# Altium PCB MainFCC_PCBBoard.PcbDoc (part 1 of 3)
Units mm, origin at the board's own origin, x right, y up, seen from the top; angles counter-clockwise.
Board outline 100 x 50 mm, 6 copper layers (Top Signal, GND1, Power, Signal, GND 2, Bottom Signal), stack 1.642 mm thick; 119 components, 79 nets, 546 pads, 1133 vias.
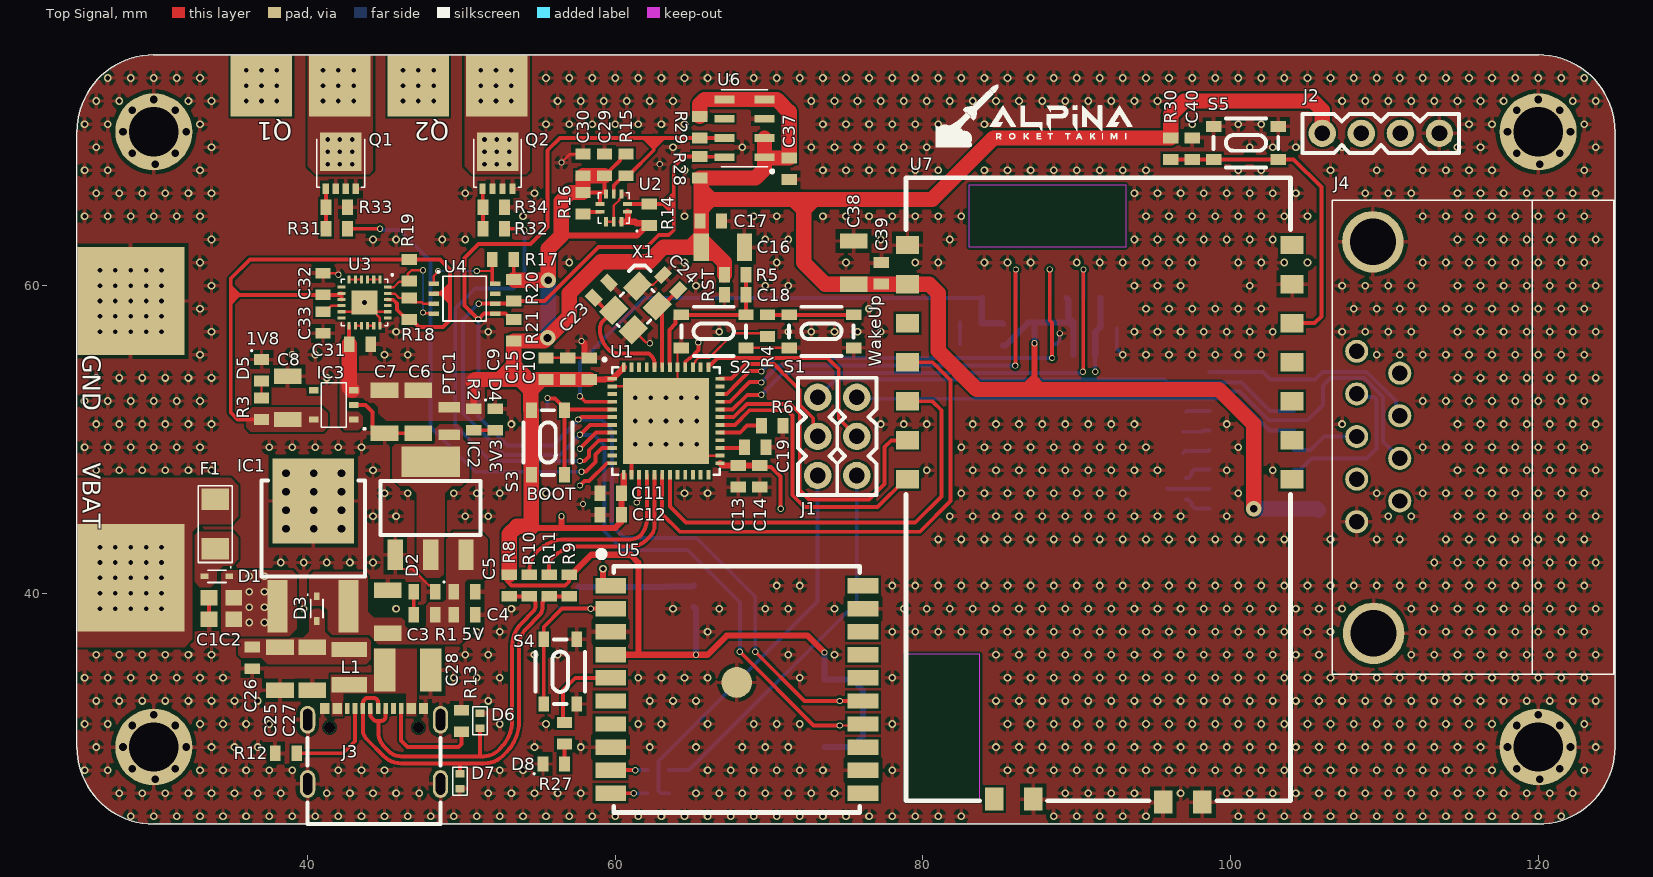
[diagram p0: Top Signal view]
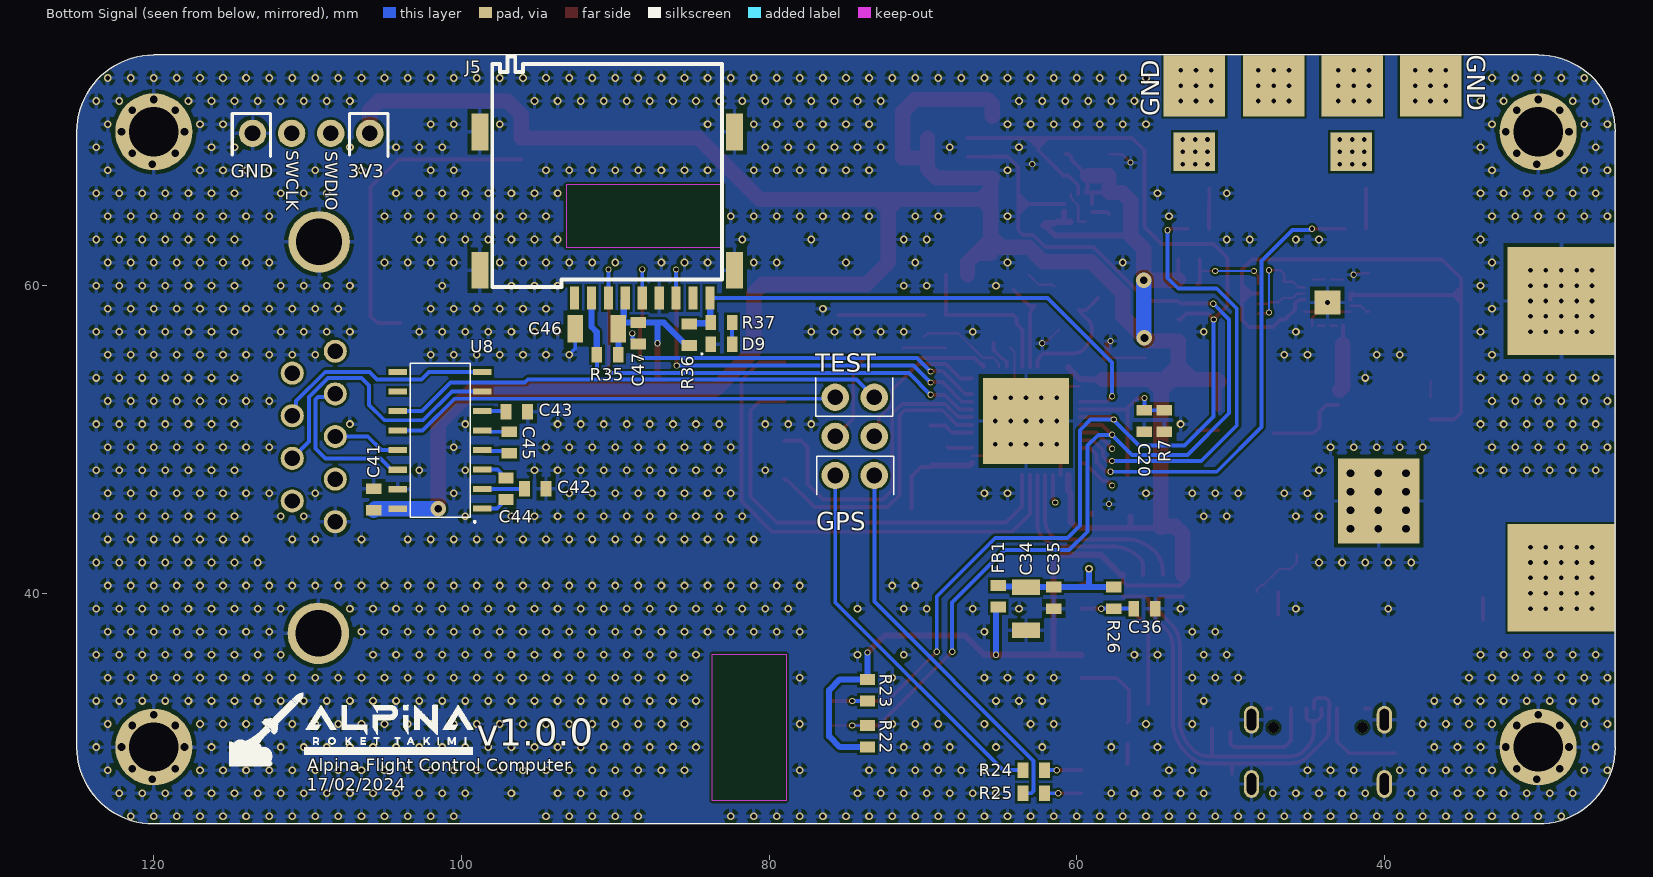
[diagram p1: Bottom Signal view, seen from below]
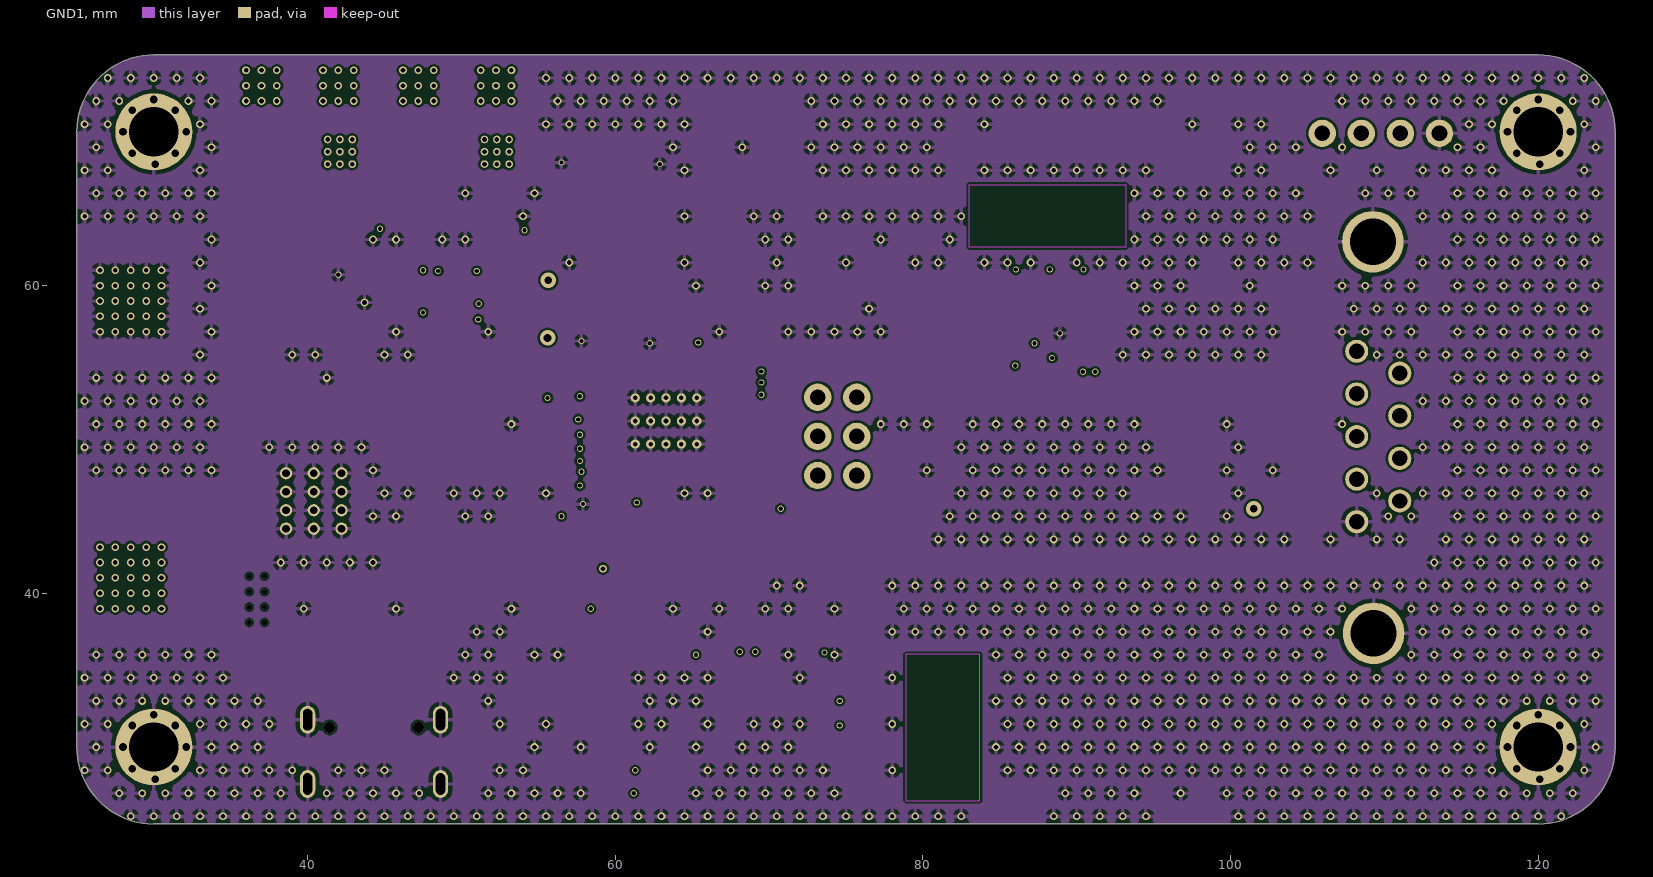
[diagram p2: GND1]
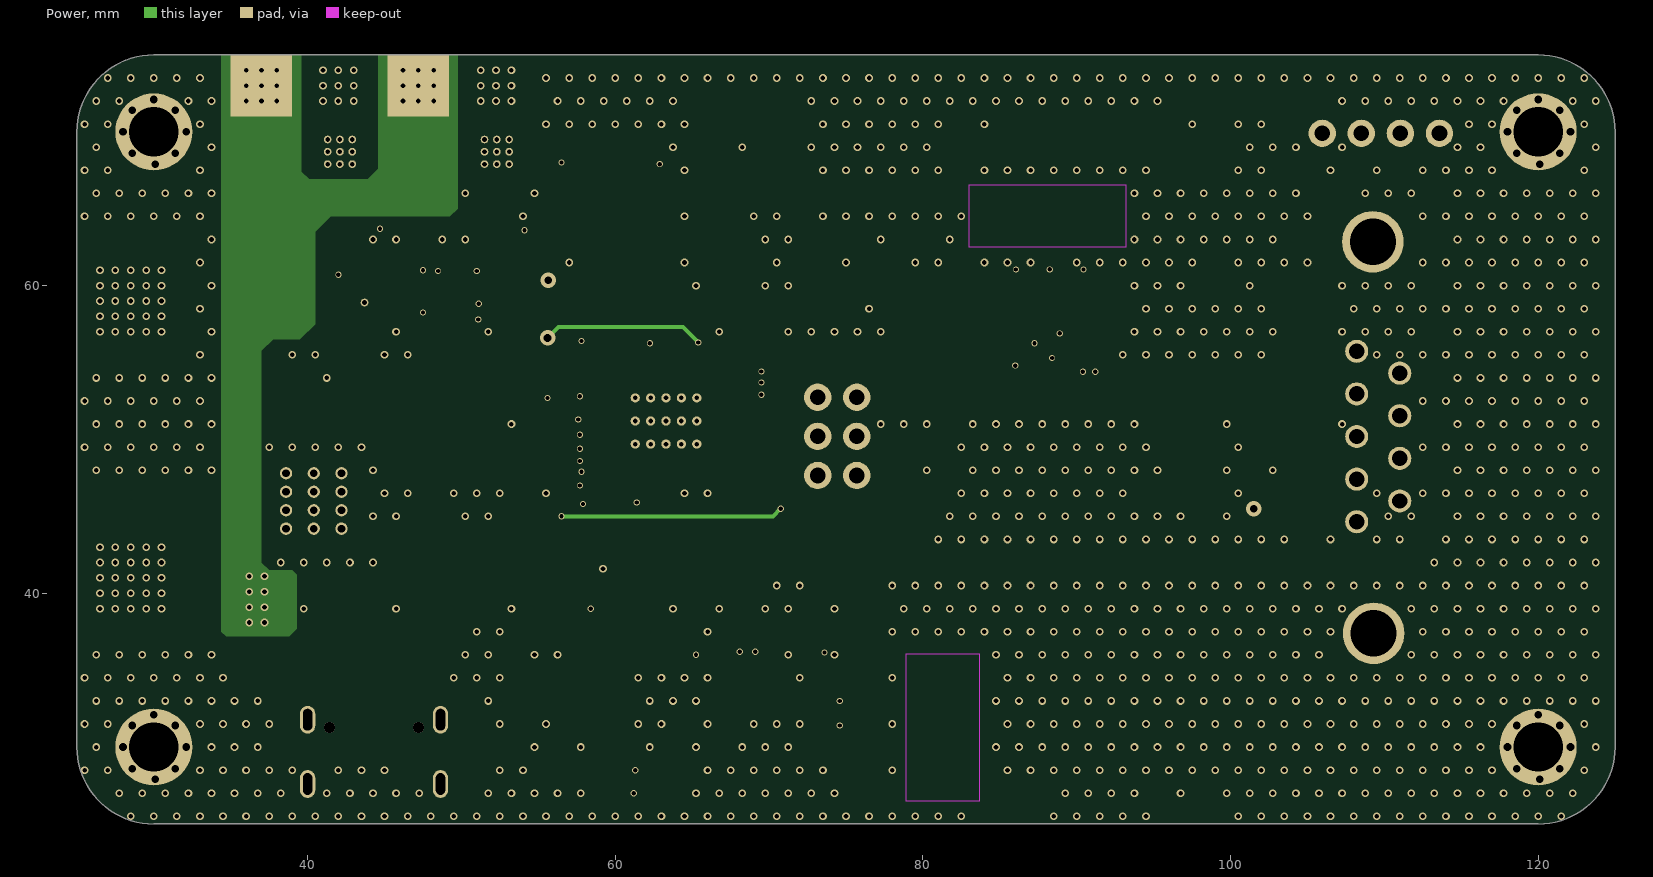
[diagram p3: Power]
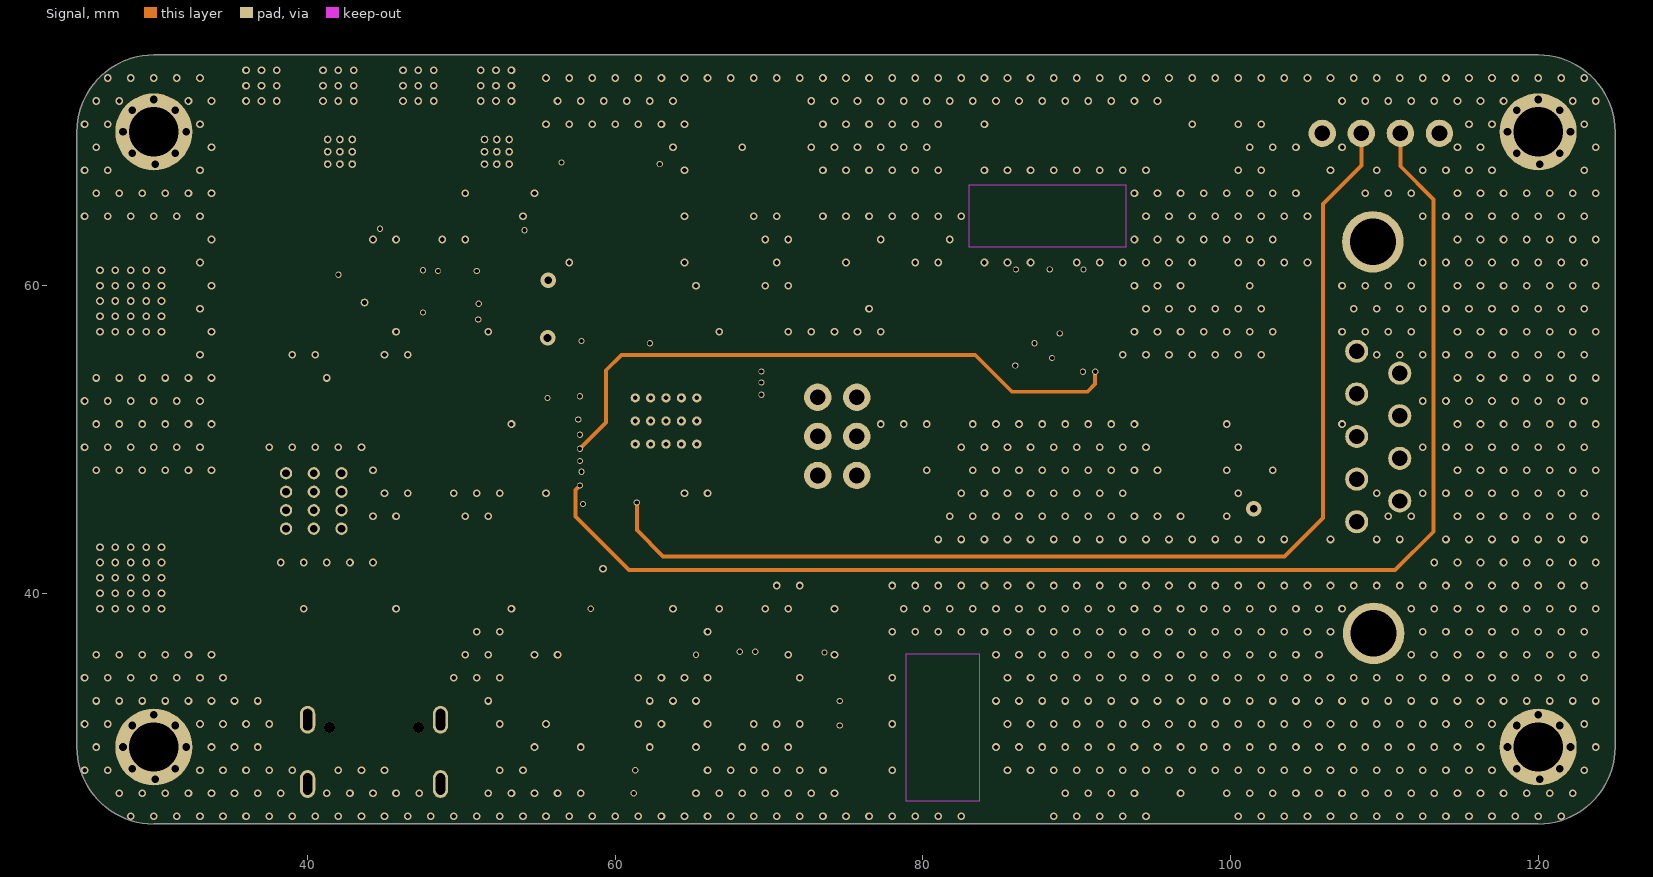
[diagram p4: Signal]
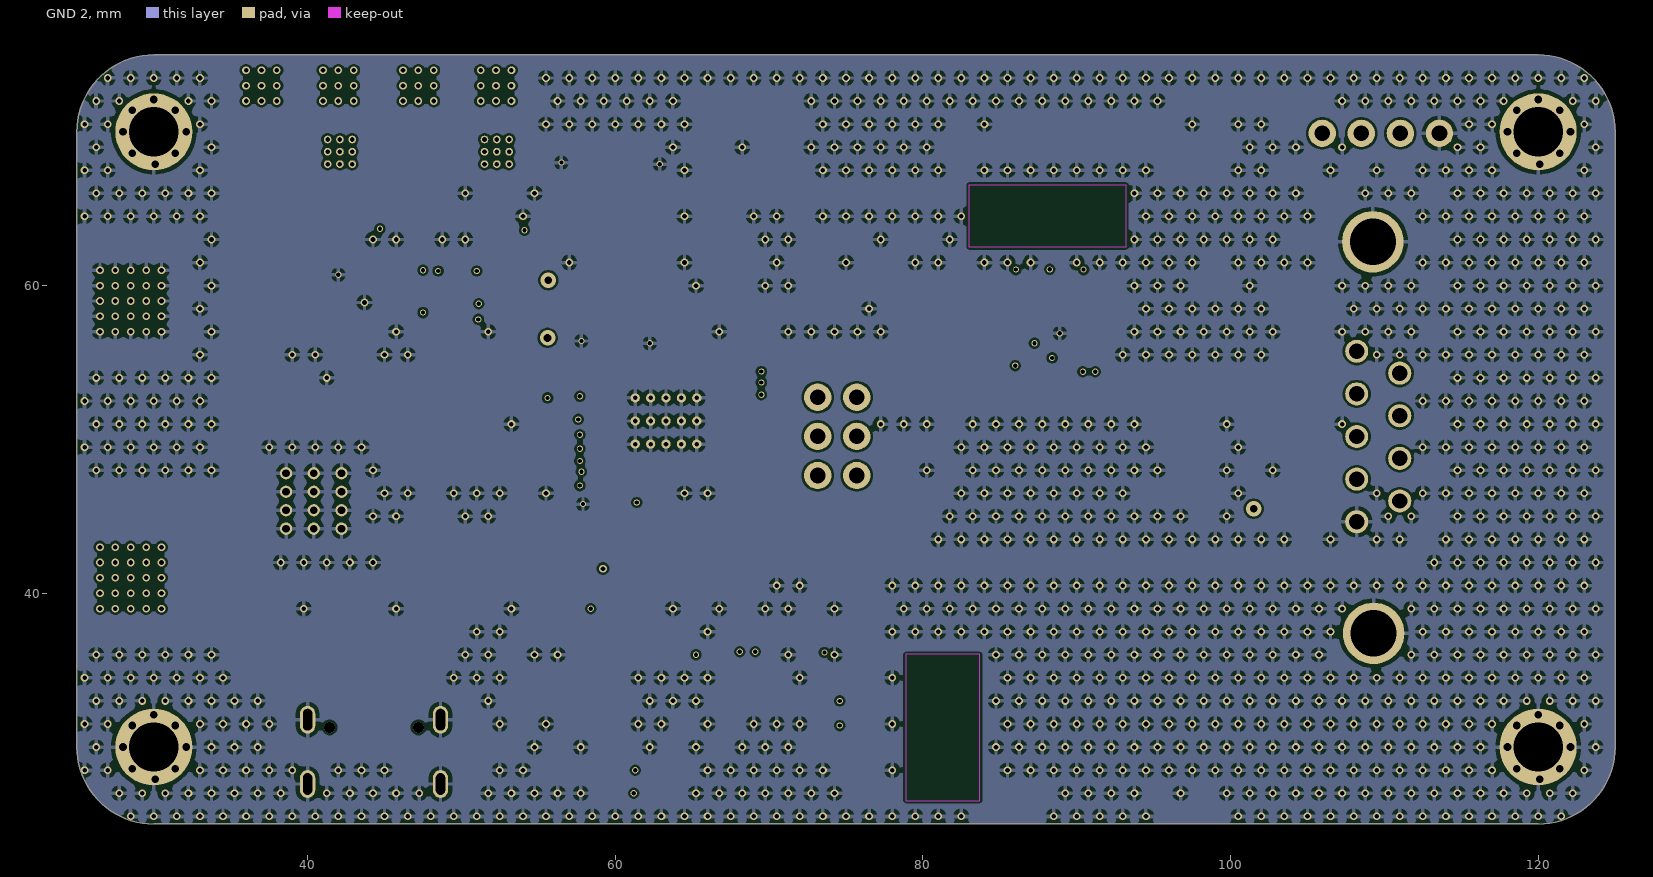
[diagram p5: GND 2]

## Layer stack, top to bottom
Top Solder: solder mask 0.0102, Solder Resist, Dk 3.5
Top Signal: signal copper 0.018
Dielectric 2: prepreg 0.1295, PP-017, Dk 4.3
GND1: signal copper 0.035
Dielectric 3: core 0.508, Core-036, Dk 4.6
Power: signal copper 0.035
Dielectric 1: core 0.1905, Core-023, Dk 4.2
Signal: signal copper 0.035
Dielectric 4: core 0.508, Core-036, Dk 4.6
GND 2: signal copper 0.035
Dielectric 5: prepreg 0.1295, PP-017, Dk 4.3
Bottom Signal: signal copper 0.018
Bottom Solder: solder mask 0.0102, Solder Resist, Dk 3.5

## Board outline
120,25 ccw(c120,30) 125,30 125,70 ccw(c120,70) 120,75 30,75 ccw(c30,70) 25,70 25,30 ccw(c30,30) 30,25

## Design rules (kind name [scope] priority, off if disabled: settings)
Clearance [All] p1: gap=0.152 ignorepadtopadclearanceinfootprint=TRUE except(0.102: Arc-Text Track-Text SMDPad-Text THPad-Text Via-Text Fill-Text Poly-Text Region-Text Text-Text Text-Hole)
DiffPairsRouting [All] p1: maxlimit=0.254 minlimit=0.152 mostfreqgap=0.254 toplayer_prefgap=0.203 toplayer_minwidth=0.152 toplayer_maxwidth=3.048 toplayer_prefwidth=0.254 midlayer1_mingap=0.254 midlayer1_minwidth=0.381 midlayer1_maxwidth=0.381 midlayer1_prefwidth=0.381 midlayer2_mingap=0.254 midlayer2_minwidth=0.381 midlayer2_maxwidth=0.381 midlayer2_prefwidth=0.381 midlayer3_mingap=0.254 midlayer3_minwidth=0.381 midlayer3_maxwidth=0.381 midlayer3_prefwidth=0.381 midlayer4_mingap=0.254 midlayer4_minwidth=0.381 midlayer4_maxwidth=0.381 midlayer4_prefwidth=0.381 bottomlayer_prefgap=0.203 bottomlayer_minwidth=0.152 bottomlayer_maxwidth=3.048 bottomlayer_prefwidth=0.254 maxuncoupledlength=12.7
HoleSize [All] p1: absolutevalues=TRUE maxlimit=6.35 minlimit=0.279 maxpercent=80.000 minpercent=20.000
HoleToHoleClearance [All] p1: gap=0.152 allowstackedmicrovias=TRUE
MinimumSolderMaskSliver MinimumSolderMaskSliver_24-QFN [HasFootprint('MergenElektronik_Sensors_Gyroscope-Accelerometer-Magnetometer_24-QFN') vs HasFootprint('MergenElektronik_Sensors_Gyroscope-Accelerometer-Magnetometer_24-QFN')] p1: minsoldermaskwidth=0
MinimumSolderMaskSliver MinimumSolderMaskSliver_UFQFPN-48 [HasFootprint('MergenElektronik_Microcontrollers_STMicroelectronics_UFQFPN-48') vs HasFootprint('MergenElektronik_Microcontrollers_STMicroelectronics_UFQFPN-48')] p2: minsoldermaskwidth=0
MinimumSolderMaskSliver MinimumSolderMaskSliver_UFQFPN20 [HasFootprint('MergenElektronik_Microcontrollers_STMicroelectronics_UFQFPN-20') vs HasFootprint('MergenElektronik_Microcontrollers_STMicroelectronics_UFQFPN-20')] p3: minsoldermaskwidth=0
MinimumSolderMaskSliver [All] p4: minsoldermaskwidth=0.076
PasteMaskExpansion [All] p1: expansion=-2539.975 usepaste=FALSE
PlaneClearance [All] p1: clearance=0.305
PlaneConnect [All] p1: planeconnectstyle=Relief reliefexpansion=0.254 reliefentries=4 reliefconductorwidth=0.254 reliefairgap=0.254
PolygonConnect PolygonConnect_12 [All vs IsNamedPolygon('GND_L01_P018') Or IsNamedPolygon('GND_L02_P009') Or IsNamedPolygon('GND_L05_P010') Or IsNamedPolygon('GND_L06_P012')] p1: connectstyle=Relief reliefconductorwidth=0.254 reliefentries=4 polygonreliefangle="90 Angle" airgapwidth=0.254
PolygonConnect PolygonConnect_11 [All vs IsNamedPolygon('1V8_L01_P016') Or IsNamedPolygon('3V3_L01_P015') Or IsNamedPolygon('5V_L01_P007') Or IsNamedPolygon('GND_L01_P018') Or IsNamedPolygon('NETC28_1_L01_P000') Or IsNamedPolygon('NETD1_1_L01_P004') Or IsNamedPolygon('NETPTC1_1_L01_P011') Or IsNamedPolygon('NETQ1_5_L01_P002') Or IsNamedPolygon('NETQ2_5_L01_P001') Or IsNamedPolygon('VBAT_L01_P005') Or IsNamedPolygon('VBUS_L01_P006') Or IsNamedPolygon('VCC_L01_P003') Or IsNamedPolygon('GND_L02_P009') Or IsNamedPolygon('VBAT_L03_P013') Or IsNamedPolygon('GND_L05_P010') Or IsNamedPolygon('GND_L06_P012') Or IsNamedPolygon('NETQ1_5_L06_P014') Or IsNamedPolygon('NETQ2_5_L06_P017')] p2: connectstyle=Direct reliefconductorwidth=0.254 reliefentries=4 polygonreliefangle="90 Angle" airgapwidth=0.254
PolygonConnect PolygonConnect_10 [All vs IsNamedPolygon('NETC28_1_L01_P000')] p3: connectstyle=Direct reliefconductorwidth=0.254 reliefentries=4 polygonreliefangle="90 Angle" airgapwidth=0.254
PolygonConnect PolygonConnect_9 [All vs IsNamedPolygon('NETQ1_5_L01_P002') Or IsNamedPolygon('NETQ2_5_L01_P001') Or IsNamedPolygon('NETQ1_5_L06_P014') Or IsNamedPolygon('NETQ2_5_L06_P017')] p4: connectstyle=Direct reliefconductorwidth=0.254 reliefentries=4 polygonreliefangle="90 Angle" airgapwidth=0.254
PolygonConnect PolygonConnect_8 [All vs IsNamedPolygon('VBAT_L03_P013')] p5: connectstyle=Direct reliefconductorwidth=0.254 reliefentries=4 polygonreliefangle="90 Angle" airgapwidth=0.254
PolygonConnect PolygonConnect_7 [All vs IsNamedPolygon('1V8_L01_P016') Or IsNamedPolygon('3V3_L01_P015') Or IsNamedPolygon('5V_L01_P007') Or IsNamedPolygon('NETD1_1_L01_P004') Or IsNamedPolygon('NETPTC1_1_L01_P011') Or IsNamedPolygon('VBAT_L01_P005') Or IsNamedPolygon('VBUS_L01_P006') Or IsNamedPolygon('VCC_L01_P003')] p6: connectstyle=Direct reliefconductorwidth=0.254 reliefentries=4 polygonreliefangle="90 Angle" airgapwidth=0.254
PolygonConnect PolygonConnect_6 [All vs IsNamedPolygon('VCC_L01_P003')] p7: connectstyle=Relief reliefconductorwidth=0.254 reliefentries=4 polygonreliefangle="90 Angle" airgapwidth=0.254
PolygonConnect PolygonConnect_5 [All vs IsNamedPolygon('1V8_L01_P016')] p8: connectstyle=Direct reliefconductorwidth=0.254 reliefentries=4 polygonreliefangle="90 Angle" airgapwidth=0.254
PolygonConnect PolygonConnect_4 [All vs IsNamedPolygon('3V3_L01_P015') Or IsNamedPolygon('5V_L01_P007') Or IsNamedPolygon('NETD1_1_L01_P004') Or IsNamedPolygon('NETPTC1_1_L01_P011') Or IsNamedPolygon('VBAT_L01_P005') Or IsNamedPolygon('VBUS_L01_P006') Or IsNamedPolygon('VCC_L01_P003')] p9: connectstyle=Direct reliefconductorwidth=0.254 reliefentries=4 polygonreliefangle="90 Angle" airgapwidth=0.254
PolygonConnect PolygonConnect_3 [All vs IsNamedPolygon('VBAT_L01_P005')] p10: connectstyle=Direct reliefconductorwidth=0.254 reliefentries=4 polygonreliefangle="90 Angle" airgapwidth=0.254
PolygonConnect PolygonConnect_2 [All vs IsNamedPolygon('NETD1_1_L01_P004')] p11: connectstyle=Direct reliefconductorwidth=0.254 reliefentries=4 polygonreliefangle="90 Angle" airgapwidth=0.254
PolygonConnect PolygonConnect_1 [All vs IsNamedPolygon('VCC_L01_P003')] p12: connectstyle=Direct reliefconductorwidth=0.254 reliefentries=4 polygonreliefangle="90 Angle" airgapwidth=0.254
PolygonConnect [All] p13: connectstyle=Relief reliefconductorwidth=0.254 reliefentries=4 polygonreliefangle="90 Angle" airgapwidth=0.254
RoutingCorners [All] p1: cornerstyle=45-Degree minsetback=1.016 maxsetback=1.016
RoutingTopology [All] p1: topology=Daisy_Balanced
RoutingVias [All] p1: holewidth=0.305 width=0.406 viastyle="Through Hole" minholewidth=0.279 minwidth=0.406 maxholewidth=6.35 maxwidth=8.128
SilkToSilkClearance [All] p1: silktosilkclearance=0.076
SilkToSolderMaskClearance [IsPad] p1: minsilkscreentomaskgap=0.076 clearancetoexposedcopper=TRUE
SolderMaskExpansion [All] p1: expansion=0.102 istentingtop=FALSE
SupplyNets "Schematic Supply Nets_11" [InNet('3V3')] p1: voltage=0.000
SupplyNets "Schematic Supply Nets_10" [InNet('1V8')] p2: voltage=0.000
SupplyNets "Schematic Supply Nets_9" [InNet('5V')] p3: voltage=0.000
SupplyNets "Schematic Supply Nets_8" [InNet('GND')] p4: voltage=0.000
SupplyNets "Schematic Supply Nets_7" [InNet('VBUS')] p5: voltage=0.000
SupplyNets "Schematic Supply Nets" [InNet('VBAT')] p6: voltage=0.000
SupplyNets "Schematic Supply Nets_1" [InNet('VCC')] p7: voltage=0.000
Width [All] p1: maxlimit=5.08 minlimit=0.152 preferedwidth=0.254 midlayer1_minwidth=0.254 midlayer1_maxwidth=0.254 midlayer2_minwidth=0.254 midlayer2_maxwidth=0.254 midlayer3_minwidth=0.254 midlayer3_maxwidth=0.254 midlayer4_minwidth=0.254 midlayer4_maxwidth=0.254 minimp=50.000000 maximp=50.000000 favimp=50.000000
19 further rules are at their usual default settings.

## Classes and differential pairs
differential pair class USB_Lines: USB V_USB
net class USB: USB_N USB_P V_USB_N V_USB_P
component class USB: C25 C26 C27 C28 D7 J3 L1 R8 R9 R10 R12 R13
component class Test: C41 C42 C43 C44 C45 J4 U8
component class SDCard: C46 C47 D9 J5 R35 R36 R37
component class PressureandTemperature: C29 C30 R14 R15 R16 U2
component class Power: C1 C2 C3 C4 C5 C6 C7 C8 D1 D2 D3 D4 D5 F1 IC1 IC2 IC3 PTC1 R1 R2 R3
component class MOSFETs: Q1 Q2 R31 R32 R33 R34
component class Microcontroller: C9 C10 C11 C12 C13 C14 C15 C16 C17 C18 C19 C20 C23 C24 J1 J2 R4 R5 R6 R7 S1 S2 S3 U1 X1
component class LoRa: C38 C39 C40 R30 S5 U7
component class Gyro: C31 C32 C33 R17 R18 R19 R20 R21 U3 U4
component class GPS: C34 C35 C36 D8 FB1 R22 R23 R24 R25 R26 R27 S4 U5
component class Altimeter: C37 R28 R29 U6
differential pair V_USB: +V_USB_P -V_USB_N
differential pair USB: +USB_P -USB_N

## Components (designator, comment, footprint, x,y, rotation, side; value= is the part's Value field where it differs from the comment)
C1 "10 µF" MergenElektronik_Capacitors_Ceramics_SMDs_0603_L_NS 34.4,39.7 r180 top
C2 "0.33 µF" MergenElektronik_Capacitors_Ceramics_SMDs_0603_L_NS 34.4,38.3 r180 top
C3 "1 µF" MergenElektronik_Capacitors_Ceramics_SMDs_1206_M_NS 46,37.2 r90 top
C4 "10 µF" MergenElektronik_Capacitors_Ceramics_SMDs_0603_M_NS 50.2,38.6 r0 top
C5 "0.33 µF" MergenElektronik_Capacitors_Ceramics_SMDs_0603_M_NS 50.2,40.1 r0 top
C6 "1 µF" MergenElektronik_Capacitors_Ceramics_SMDs_1206_M_NS 46.4,53.4 r270 top
C7 "1 µF" MergenElektronik_Capacitors_Ceramics_SMDs_1206_M_NS 44.2,53.4 r270 top
C8 "1 µF" MergenElektronik_Capacitors_Ceramics_SMDs_1206_M_NS 39.5,51.1 r90 top
C9 "4.7 µF" MergenElektronik_Capacitors_Ceramics_SMDs_0603_M_NS 55.5,54.6 r90 top
C10 "100 nF" MergenElektronik_Capacitors_Ceramics_SMDs_0603_M_NS 58.3,54.6 r90 top
C11 "100 nF" MergenElektronik_Capacitors_Ceramics_SMDs_0603_M_NS 59.7,46.5 r180 top
C12 "100 nF" MergenElektronik_Capacitors_Ceramics_SMDs_0603_M_NS 59.7,45.1 r180 top
C13 "100 nF" MergenElektronik_Capacitors_Ceramics_SMDs_0603_M_NS 68,47.6 r270 top
C14 "100 nF" MergenElektronik_Capacitors_Ceramics_SMDs_0603_M_NS 69.4,47.6 r270 top
C15 "100 nF" MergenElektronik_Capacitors_Ceramics_SMDs_0603_M_NS 56.9,54.6 r90 top
C16 "1 µF" MergenElektronik_Capacitors_Ceramics_SMDs_1206_M_NS 65.4,61.7 r0 top
C17 "100 nF" MergenElektronik_Capacitors_Ceramics_SMDs_0603_M_NS 66.2,64.2 r0 top
C18 "100 nF" MergenElektronik_Capacitors_Ceramics_SMDs_0603_M_NS 67.8,59.4 r180 top
C19 "4.7 µF" MergenElektronik_Capacitors_Ceramics_SMDs_0603_M_NS 69.1,49.5 r0 top
C20 "100 nF" MergenElektronik_Capacitors_Ceramics_SMDs_0603_M_NS 55.6,51.2 r270 bottom
C23 "18 pF" MergenElektronik_Capacitors_Ceramics_SMDs_0603_M_NS 59.1,59.7 r45 top
C24 "18 pF" MergenElektronik_Capacitors_Ceramics_SMDs_0603_M_NS 63.6,60.2 r135 top
C25 "47 µF" MergenElektronik_Capacitors_Ceramics_SMDs_1206_M_NS 37.4,36.7 r270 top
C26 "10 µF" MergenElektronik_Capacitors_Ceramics_SMDs_0603_M_NS 36.4,35.8 r270 top
C27 "1 µF" MergenElektronik_Capacitors_Ceramics_SMDs_1206_M_NS 39.5,36.7 r270 top
C28 "100 µF" MergenElektronik_Capacitors_Ceramics_SMDs_1210_M_NS 46.5,35 r0 top
C29 "100 nF" MergenElektronik_Capacitors_Ceramics_SMDs_0603_M_NS 59.3,67.85 r90 top
C30 "100 nF" MergenElektronik_Capacitors_Ceramics_SMDs_0603_M_NS 57.9,67.85 r90 top
C31 "100 nF" MergenElektronik_Capacitors_Ceramics_SMDs_0603_M_NS 43.4,56.2 r0 top
C32 "100 nF" MergenElektronik_Capacitors_Ceramics_SMDs_0603_M_NS 41,60.1 r90 top
C33 "100 nF" MergenElektronik_Capacitors_Ceramics_SMDs_0603_M_NS 41,57.6 r270 top
C34 "1 µF" MergenElektronik_Capacitors_Ceramics_SMDs_1206_M_NS 64.1,40.6 r270 bottom
C35 "100 nF" MergenElektronik_Capacitors_Ceramics_SMDs_0603_M_NS 61.5,39.7 r270 bottom
C36 "100 nF" MergenElektronik_Capacitors_Ceramics_SMDs_0603_M_NS 55.6,39 r180 bottom
C37 "100 nF" MergenElektronik_Capacitors_Ceramics_SMDs_0603_M_NS 71.3,67.6 r270 top
C38 "1 µF" MergenElektronik_Capacitors_Ceramics_SMDs_1206_M_NS 76.3,59.9 r90 top
C39 "100 nF" MergenElektronik_Capacitors_Ceramics_SMDs_0603_M_NS 77.3,60.8 r90 top
C40 "100 nF" MergenElektronik_Capacitors_Ceramics_SMDs_0603_M_NS 97.5,68.9 r90 top
C41 "100 nF" MergenElektronik_Capacitors_Ceramics_SMDs_0603_M_NS 105.7,46.1 r90 bottom
C42 "100 nF" MergenElektronik_Capacitors_Ceramics_SMDs_0603_M_NS 95.2,46.8 r180 bottom
C43 "100 nF" MergenElektronik_Capacitors_Ceramics_SMDs_0603_M_NS 96.4,51.8 r180 bottom
C44 "100 nF" MergenElektronik_Capacitors_Ceramics_SMDs_0603_M_NS 97.1,46.8 r90 bottom
C45 "100 nF" MergenElektronik_Capacitors_Ceramics_SMDs_0603_M_NS 96.9,49.8 r90 bottom
C46 "1 µF" MergenElektronik_Capacitors_Ceramics_SMDs_1206_M_NS 89.6,58 r0 bottom
C47 "100 nF" MergenElektronik_Capacitors_Ceramics_SMDs_0603_M_NS 88.5,56.9 r270 bottom
D1 "B0520LW-7-F" MergenElektronik_Diodes_SchottkyDiodes_SOD-523 33.5,40.7 r0 top
D2 "Red" MergenElektronik_Leds_SMDs_0603_M_NS 47.6,40.1 r0 top
D3 "B0520LW-7-F" MergenElektronik_Diodes_SchottkyDiodes_SOD-523 41,38.4 r90 top
D4 "Red" MergenElektronik_Leds_SMDs_0603_M_NS 52.2,51.3 r90 top
D5 "Red" MergenElektronik_Leds_SMDs_0603_M_NS 37,54.5 r90 top
D6 "DESD3V3S1BL-7B" MergenElektronik_Diodes_TVSDiodes_0402_L 51.2,31.7 r270 top
D7 "DESD3V3S1BL-7B" MergenElektronik_Diodes_TVSDiodes_0402_L 49.9,27.8 r90 top
D8 "Green" MergenElektronik_Leds_SMDs_0603_M_NS 56,28.9 r180 top
D9 "White" MergenElektronik_Leds_SMDs_0603_M_NS 83.1,56.2 r0 bottom
F1 "C1Q 5" MergenElektronik_CircuitProtections_Fuses_1206_l 33.2,46.1 r270 top
FB1 "BLM18BD601SN1D" MergenElektronik_Filters_FerriteBeads_0603_M_NS 65.1,39.8 r90 bottom
IC1 "7805" MergenElektronik_Regulators_Linears_DPAK 37,41.1 r0 top value=MC7805BDTG
IC2 "NCP1117 - 3v3" MergenElektronik_Regulators_Linears_SOT223 44.75,43.8 r0 top value=NCP1117ST33T3G
IC3 "MIC5504-1.8YM5-TR" MergenElektronik_Regulators_Linears_SOT-23-5 40.9,53.7 r270 top
J1 "2x3" MergenElektronik_Connectors_Headers_2x3_Male 75.7,47.66 r90 top
J2 "1x4" MergenElektronik_Connectors_Headers_1x4_Male 113.58,69.9 r180 top
J3 "USB4105" MergenElektronik_Connectors_USB_USB4105 40,25 r0 top
J4 "Female D-Sub" MergenElektronik_Libraries_Connectors_D-Sub_9Position 124.9,34.75 r90 top value="A-DF 09 A/KG-T2S"
J5 "MEM2075" MergenElektronik_Connectors_MicroSD_MEM2075 83,74.4 r0 bottom
L1 "2.2  µH" MergenElektronik_Inductors_PowerInductors_SMDs_1008_M_NS 42.7,35.2 r270 top
PTC1 "0ZCK0020FF2G" MergenElektronik_CircuitProtections_PTCs_0805_M_NS 49.2,51.2 r90 top
Q1 "DMN1004UFV-7" MergenElektronik_Transistors_Mosfets_8-PowerVDFN 40.6,66.4 r0 top
Q2 "DMN1004UFV-7" MergenElektronik_Transistors_Mosfets_8-PowerVDFN 50.8,66.4 r0 top
R1 "330" MergenElektronik_Resistors_ChipResistors_0603_M_NS 47.6,38.6 r180 top value="Chip Resistor - 0603 - 330R"
R2 "330" MergenElektronik_Resistors_ChipResistors_0603_M_NS 50.8,51.3 r270 top value="Chip Resistor - 0603 - 330R"
R3 "330" MergenElektronik_Resistors_ChipResistors_0603_M_NS 37,52 r90 top value="Chip Resistor - 0603 - 330R"
R4 "330" MergenElektronik_Resistors_ChipResistors_0603_M_NS 69.9,57.4 r90 top value="Chip Resistor - 0603 - 330R"
R5 "40K" MergenElektronik_Resistors_ChipResistors_0603_M_NS 67.8,60.7 r0 top value="Chip Resistor - 0603 - 40K"
R6 "10K" MergenElektronik_Resistors_ChipResistors_0603_M_NS 70.2,50.9 r180 top value="Chip Resistor - 0603 - 10K"
R7 "10K" MergenElektronik_Resistors_ChipResistors_0603_M_NS 54.3,51.2 r90 bottom value="Chip Resistor - 0603 - 10K"
R8 "1.8K" MergenElektronik_Resistors_ChipResistors_0603_M_NS 53.1,40.5 r90 top value="Chip Resistor - 0603 - 1.8K"
R9 "1.8K" MergenElektronik_Resistors_ChipResistors_0603_M_NS 57,40.5 r90 top value="Chip Resistor - 0603 - 1.8K"
R10 "22" MergenElektronik_Resistors_ChipResistors_0603_M_NS 54.4,40.5 r90 top value="Chip Resistor - 0603 - 22"
R11 "22" MergenElektronik_Resistors_ChipResistors_0603_M_NS 55.7,40.5 r90 top value="Chip Resistor - 0603 - 22"
R12 "5.1K" MergenElektronik_Resistors_ChipResistors_0603_M_NS 38.6,29.6 r180 top value="Chip Resistor - 0603 - 5.1K"
R13 "5.1K" MergenElektronik_Resistors_ChipResistors_0603_M_NS 50,31.7 r90 top value="Chip Resistor - 0603 - 5.1K"
R14 "4.7K" MergenElektronik_Resistors_ChipResistors_0603_M_NS 62.2,64.6 r270 top value="Chip Resistor - 0603 - 4.7K"
R15 "4.7K" MergenElektronik_Resistors_ChipResistors_0603_M_NS 60.7,67.85 r90 top value="Chip Resistor - 0603 - 4.7K"
R16 "10K" MergenElektronik_Resistors_ChipResistors_0603_M_NS 57.9,65.35 r90 top value="Chip Resistor - 0603 - 10K"
R17 "200K" MergenElektronik_Resistors_ChipResistors_0603_M_NS 52.7,61.7 r0 top value="Chip Resistor - 0603 - 200K"
R18 "10K" MergenElektronik_Resistors_ChipResistors_0603_M_NS 46.6,58.5 r270 top value="Chip Resistor - 0603 - 10K"
R19 "10K" MergenElektronik_Resistors_ChipResistors_0603_M_NS 46.6,61 r90 top value="Chip Resistor - 0603 - 10K"
R20 "10K" MergenElektronik_Resistors_ChipResistors_0603_M_NS 53.4,59.7 r90 top value="Chip Resistor - 0603 - 10K"
R21 "10K" MergenElektronik_Resistors_ChipResistors_0603_M_NS 53.4,57.1 r270 top value="Chip Resistor - 0603 - 10K"
R22 "10K" MergenElektronik_Resistors_ChipResistors_0603_M_NS 73.6,30.7 r90 bottom value="Chip Resistor - 0603 - 10K"
R23 "10K" MergenElektronik_Resistors_ChipResistors_0603_M_NS 73.6,33.7 r270 bottom value="Chip Resistor - 0603 - 10K"
R24 "470" MergenElektronik_Resistors_ChipResistors_0603_M_NS 62.8,28.5 r0 bottom value="Chip Resistor - 0603 - 470"
R25 "470" MergenElektronik_Resistors_ChipResistors_0603_M_NS 62.8,27 r0 bottom value="Chip Resistor - 0603 - 470"
R26 "10K" MergenElektronik_Resistors_ChipResistors_0603_M_NS 57.6,39.7 r90 bottom value="Chip Resistor - 0603 - 10K"
R27 "470" MergenElektronik_Resistors_ChipResistors_0603_M_NS 56.7,30.9 r90 top value="Chip Resistor - 0603 - 470"
R28 "10K" MergenElektronik_Resistors_ChipResistors_0603_M_NS 65.5,67.7 r270 top value="Chip Resistor - 0603 - 10K"
R29 "10K" MergenElektronik_Resistors_ChipResistors_0603_M_NS 65.5,70.3 r90 top value="Chip Resistor - 0603 - 10K"
R30 "10K" MergenElektronik_Resistors_ChipResistors_0603_M_NS 96.1,68.9 r270 top value="Chip Resistor - 0603 - 10K"
R31 "1K" MergenElektronik_Resistors_ChipResistors_0603_M_NS 41.9,63.7 r180 top value="Chip Resistor - 0603 - 1K"
R32 "1K" MergenElektronik_Resistors_ChipResistors_0603_M_NS 52.1,63.7 r180 top value="Chip Resistor - 0603 - 1K"
R33 "10K" MergenElektronik_Resistors_ChipResistors_0603_M_NS 41.9,65.1 r180 top value="Chip Resistor - 0603 - 10K"
R34 "10K" MergenElektronik_Resistors_ChipResistors_0603_M_NS 52.1,65.1 r180 top value="Chip Resistor - 0603 - 10K"
R35 "10K" MergenElektronik_Resistors_ChipResistors_0603_M_NS 90.5,55.5 r0 bottom value="Chip Resistor - 0603 - 10K"
R36 "10K" MergenElektronik_Resistors_ChipResistors_0603_M_NS 85.2,56.8 r90 bottom value="Chip Resistor - 0603 - 10K"
R37 "330" MergenElektronik_Resistors_ChipResistors_0603_M_NS 83.1,57.6 r180 bottom value="Chip Resistor - 0603 - 330R"
S1 "PTS815-SJM" MergenElektronik_Switches_TactileSwitches_PTS815 71.3,55.425 r0 top
S2 "PTS815-SJM" MergenElektronik_Switches_TactileSwitches_PTS815 68.5,58.625 r180 top
S3 "PTS815-SJM" MergenElektronik_Switches_TactileSwitches_PTS815 57.225,47.7 r90 top
S4 "PTS815-SJM" MergenElektronik_Switches_TactileSwitches_PTS815 54.825,37 r270 top
S5 "PTS815-SJM" MergenElektronik_Switches_TactileSwitches_PTS815 98.9,67.675 r0 top
U1 "STM32F411CEU6" MergenElektronik_Microcontrollers_STMicroelectronics_UFQFPN-48 59.8,47.7 r0 top
U2 "BMP390" MergenElektronik_Sensors_PressureSensors_10-WFLGA 58.9,66.05 r270 top
U3 "ICM-20948" MergenElektronik_Sensors_Gyroscope-Accelerometer-Magnetometer_24-QFN 42.2,60.4 r270 top
U4 "PCA9306DCTR" MergenElektronik_Logics_LevelShifters_SSOP-8 48.8,57.7 r0 top
U5 "CD-PA1616S" MergenElektronik_Modules_GPS_CD-PA1616S 59.9,25.75 r0 top
U6 "MS561101BA03-50" MergenElektronik_Sensors_AltimeterSensors_MS561101BA03-50 69.9,72.725 r180 top
U7 "Ebyte-E32-868T30s" MergenElektronik_Modules_LoRas_Ebyte-E32-xxxxT30x 78.9,26.52 r0 top
U8 "MAX3232ESE+" MergenElektronik_Interfaces_RS232s_SOIC-16 99.436,54.943 r0 bottom
X1 "26 MHz" MergenElektronik_Oscillators_Crystals_4-SMD 61.067,56.526 r45 top (schematic designator X2)

## Footprints (in the part's own frame and the unit in brackets; to place one, negate y for a bottom-side part, rotate by r counter-clockwise, add the part's x,y. Pads: shape width x height; smd on the part's side, far side on the other; paste and mask are expansions set on the pad)
MergenElektronik_Capacitors_Ceramics_SMDs_0603_L_NS [mm] "0603 Large - No Silkscreen"
  rect 1.1x1 smd: 1(-0.8,0) 2(0.8,0)
  body extent -0.8,-0.4 0.8,0.4, height 0.85
MergenElektronik_Capacitors_Ceramics_SMDs_0603_M_NS [mm] "0603 Medium - No Silkscreen"
  rect 0.7x1 smd: 1(-0.7,0) 2(0.7,0)
  body extent -0.8,-0.4 0.8,0.4, height 0.85
MergenElektronik_Capacitors_Ceramics_SMDs_1206_M_NS [mm] "1206 Medium - No Silkscreen"
  rect 1x1.8 smd: 1(0.2,0.8) 2(3,0.8)
  body extent 0,0 3.2,1.6, height 1.35
MergenElektronik_Capacitors_Ceramics_SMDs_1210_M_NS [mm] "1210 Medium - No Silkscreen"
  rect 1.4x2.8 smd: 1(-1.5,0) 2(1.5,0)
  body extent -1.6,-1.25 1.6,1.25, height 1.35
MergenElektronik_CircuitProtections_Fuses_1206_l [mm] "1206 Large"
  rect 1.4x1.8 smd: 1(0,0.8) 2(3.2,0.8)
  silkscreen extent -0.9,-0.3 4.1,1.9, body extent 0,0.02 3.1,1.57, height 0.55
MergenElektronik_CircuitProtections_PTCs_0805_M_NS [mm] "0805 Medium - No Silkscreen"
  rect 0.7x1.4 smd: 1(-0.9,0) 2(0.9,0)
  body extent -1,-0.63 1,0.62, height 0.5
MergenElektronik_Connectors_Headers_1x4_Male [mil] "1x4 Male"
  round 70 hole 40: 1(0,0) 2(100,0) 3(200,0) 4(300,0)
  silkscreen extent -50,-50 350,50, body extent -50,-50 350,48, height 415
MergenElektronik_Connectors_Headers_2x3_Male [mil] "2x3 Male"
  round 70 hole 40: 1(0,0) 2(100,0) 3(200,0) 4(0,100) 5(100,100) 6(200,100)
  silkscreen extent -50,-50 250,150, body extent -50,-50 250,148, height 415
MergenElektronik_Connectors_MicroSD_MEM2075 [mm] "Mergen Elektronik - Connectors - SD Card Connectors - MEM2075"
  rect 0.6x1.5 smd: CD(0.845,15.2) P1(9.645,15.2) P2(8.545,15.2) P3(7.445,15.2) P4(6.345,15.2) P5(5.245,15.2) P6(4.145,15.2) P7(3.045,15.2) P8(1.945,15.2)
  rect 1.1x2.4 smd: SHIELD(-0.75,4.4) SHIELD(-0.75,13.4) SHIELD(15.8,4.4) SHIELD(15.8,13.4)
  Keep-Out Layer region: 0,7.85 10.2,7.85 10.2,11.9 0,11.9
  silkscreen extent 0.05,-0.5 15,14.5, body extent -0.7,0 15.74,15.85, height 1.4
MergenElektronik_Connectors_USB_USB4105 [mm] "USB4105"
  rect 0.3x0.7 smd: A1(0.97,7.5) A4(1.78,7.5) A5(3.08,7.5) A6(4.08,7.5) A7(4.58,7.5) A8(5.58,7.5) A9(6.88,7.5) A12(7.68,7.5) B1(7.38,7.5) B4(6.58,7.5) B5(6.08,7.5) B6(5.08,7.5) B7(3.58,7.5) B8(2.58,7.5) B9(2.08,7.5) B12(1.27,7.5)
  oval 1x1.8 hole 0.6 slot 1.4 at 90 deg: Shield(0,2.6) Shield(0,6.78) Shield(8.64,2.6) Shield(8.64,6.78)
  silkscreen extent 0,0 8.64,5.6, body extent -0.14,-0.08 8.79,7.62, height 3.26
MergenElektronik_Diodes_SchottkyDiodes_SOD-523 [mm] "SOD-523"
  rect 0.5x0.35 smd: 1(-0.2,0.4) 2(1.4,0.4)
  silkscreen extent 0,0 1.54,1.04, body extent -0.25,-0.04 1.45,0.84, height 0.46
MergenElektronik_Diodes_TVSDiodes_0402_L [mm] "0402 Large"
  rect 0.5x0.6 smd: 1(-0.5,0) 2(0.475,0)
  silkscreen extent -0.92,-0.48 0.9,0.48, body extent -0.53,-0.34 0.53,0.34, height 0.54
MergenElektronik_Filters_FerriteBeads_0603_M_NS [mm] "0603 Medium - No Silkscreen"
  rect 0.7x1 smd: 1(-0.7,0) 2(0.7,0)
  body extent -0.8,-0.42 0.8,0.38, height 0.8
MergenElektronik_Inductors_PowerInductors_SMDs_1008_M_NS [mm] "1008 Medium - No Silkscreen"
  rect 1x2.3 smd: 1(-1.143,0) 2(1.143,0)
  body extent -1.25,-1 1.25,1, height 1.6
MergenElektronik_Interfaces_RS232s_SOIC-16 [mm] "SOIC-16"
  rect 1.2x0.4 smd: 1(-0.8,9.44) 2(-0.8,8.17) 3(-0.8,6.9) 4(-0.8,5.63) 5(-0.8,4.36) 6(-0.8,3.09) 7(-0.8,1.82) 8(-0.8,0.55) 9(4.7,0.56) 10(4.7,1.83) 11(4.7,3.1) 12(4.7,4.37) 13(4.7,5.64) 14(4.7,6.91) 15(4.7,8.18) 16(4.7,9.45)
  silkscreen extent -0.35,0 3.9,10.35, body extent -1.05,0.05 4.95,9.95, height 1.75
MergenElektronik_Leds_SMDs_0603_M_NS [mm] "0603 Medium - No Silckscreen"
  rect 0.7x1 smd: 1(-0.7,0) 2(0.7,0)
  silkscreen extent 1.22,0.58 1.32,0.69, body extent -0.8,-0.4 0.8,0.4, height 0.55
MergenElektronik_Libraries_Connectors_D-Sub_9Position [mm] "9 Position"
  round 1.5 hole 1: 1(20.98,16.7) 2(18.21,16.7) 3(15.44,16.7) 4(12.67,16.7) 5(9.9,16.7) 6(19.56,13.9) 7(16.79,13.9) 8(14.02,13.9) 9(11.25,13.9)
  round 4 hole 3: Shield(2.65,15.6) Shield(28.1,15.65)
  silkscreen extent 0,0 30.8,18.3, body extent 0,0 30.81,18.3, height 12.8
MergenElektronik_Logics_LevelShifters_SSOP-8 [mm] "SSOP-8"
  rect 0.7x0.3 smd: 1(-0.6,2.425) 2(-0.6,1.775) 3(-0.6,1.125) 4(-0.6,0.475) 5(3.4,0.475) 6(3.4,1.125) 7(3.4,1.775) 8(3.4,2.425)
  silkscreen extent -0.35,0 2.8,3.25, body extent -0.6,0.03 3.4,2.97, height 1.3
MergenElektronik_Microcontrollers_STMicroelectronics_UFQFPN-48 [mm] "UFQFPN-48"
  rect 0.25x0.6 smd: 1(0.75,7) 2(1.25,7) 3(1.75,7) 4(2.25,7) 5(2.75,7) 6(3.25,7) 7(3.75,7) 8(4.25,7) 9(4.75,7) 10(5.25,7) 11(5.75,7) 12(6.25,7) 25(6.25,0) 26(5.75,0) 27(5.25,0) 28(4.75,0) 29(4.25,0) 30(3.75,0) 31(3.25,0) 32(2.75,0) 33(2.25,0) 34(1.75,0) 35(1.25,0) 36(0.75,0)
  rect 0.6x0.25 smd: 13(7,6.25) 14(7,5.75) 15(7,5.25) 16(7,4.75) 17(7,4.25) 18(7,3.75) 19(7,3.25) 20(7,2.75) 21(7,2.25) 22(7,1.75) 23(7,1.25) 24(7,0.75) 37(0,0.75) 38(0,1.25) 39(0,1.75) 40(0,2.25) 41(0,2.75) 42(0,3.25) 43(0,3.75) 44(0,4.25) 45(0,4.75) 46(0,5.25) 47(0,5.75) 48(0,6.25)
  round 0.6 hole 0.3: 49(1.5,2) 49(1.5,3.5) 49(1.5,5) 49(2.5,2) 49(2.5,3.5) 49(2.5,5) 49(3.5,2) 49(3.5,3.5) 49(3.5,5) 49(4.5,2) 49(4.5,3.5) 49(4.5,5) 49(5.5,2) 49(5.5,3.5) 49(5.5,5)
  rect 5.6x5.6 smd: 49(3.5,3.5)
  rect 5.6x5.6 smd far side: 49(3.5,3.5)
  silkscreen extent -0.6,0 7,7.6, body extent -0.06,-0.06 7.06,7.06, height 0.61
MergenElektronik_Modules_GPS_CD-PA1616S [mm] "CD-PA1616S"
  rect 2x1 smd: 1(-0.2,14.75) 2(-0.2,13.25) 3(-0.2,11.75) 4(-0.2,10.25) 5(-0.2,8.75) 6(-0.2,7.25) 7(-0.2,5.75) 8(-0.2,4.25) 9(-0.2,2.75) 10(-0.2,1.25) 11(16.2,1.25) 12(16.2,2.75) 13(16.2,4.25) 14(16.2,5.75) 15(16.2,7.25) 16(16.2,8.75) 17(16.2,10.25) 18(16.2,11.75) 19(16.2,13.25) 20(16.2,14.75)
  round 2 smd: 21(8,8.45)
  silkscreen extent -0.9,0 16,16.9, body extent 0,0 16,16, height 5.1
MergenElektronik_Modules_LoRas_Ebyte-E32-xxxxT30x [mm] "Ebyte-E32-xxxxT30x"
  rect 1.5x1.2 smd: 1(0.1,36.12) 2(0.1,33.58) 3(0.1,31.04) 4(0.1,28.5) 5(0.1,25.96) 6(0.1,23.42) 7(0.1,20.88) 18(25.1,20.88) 19(25.1,23.42) 20(25.1,25.96) 21(25.1,28.5) 22(25.1,31.04) 23(25.1,33.58) 24(25.1,36.12)
  rect 1.2x1.5 smd: 11(5.73,0.1) 12(8.27,0.1) 13(16.73,-0.1) 14(19.27,-0.1)
  Keep-Out Layer region: 0,0 4.8,0 4.8,9.5 0,9.5
  silkscreen extent 0,0 25,40.5, body extent 0,0 25,40.5, height 2.9
MergenElektronik_Oscillators_Crystals_4-SMD [mm] "4-SMD"
  rect 1.5x1.2 smd: 1(0.5,2.15) 2(2.7,0.35) 3(0.5,0.35) 3(2.7,2.15)
  silkscreen extent 0,0 4,3.25, body extent 0,-0.07 3.2,2.58, height 1.07
MergenElektronik_Regulators_Linears_DPAK [mm] "DPAK"
  rect 1.3x3.4 smd: 1(1.05,-1.95) 3(5.65,-1.95)
  round 0.8 hole 0.5: 2(1.6,3.1) 2(1.6,4.3) 2(1.6,5.5) 2(1.6,6.7) 2(3.4,3.1) 2(3.4,4.3) 2(3.4,5.5) 2(3.4,6.7) 2(5.2,3.1) 2(5.2,4.3) 2(5.2,5.5) 2(5.2,6.7)
  rect 5.3x5.5 smd: 2(3.365,4.9)
  rect 5.3x5.5 smd far side: 2(3.365,4.9)
  silkscreen extent 0,0 6.73,6.22, body extent 0.04,-2.81 6.76,7.61, height 2.39
MergenElektronik_Regulators_Linears_SOT223 [mm] "SOT223"
  rect 1x2 smd: 1(0.95,-1.3) 2(3.25,-1.3) 3(5.55,-1.3)
  rect 3.8x2 smd: 2(3.25,4.75)
  silkscreen extent 0,0 6.5,3.5, body extent 0.1,-1.6 6.4,5.1, height 1.8
MergenElektronik_Regulators_Linears_SOT-23-5 [mm] "SOT-23-5"
  rect 0.4x0.6 smd: 1(2.4,2.1) 2(1.45,2.1) 3(0.5,2.1) 4(0.5,-0.5) 5(2.4,-0.5)
  silkscreen extent 0,0 3.05,2.85, body extent 0,-0.55 2.9,2.15, height 1.45
MergenElektronik_Resistors_ChipResistors_0603_M_NS [mm] "0603 Medium - No Silckscreen"
  rect 0.7x1 smd: 1(-0.7,0) 2(0.7,0)
  body extent -0.8,-0.4 0.8,0.4, height 0.45
MergenElektronik_Sensors_AltimeterSensors_MS561101BA03-50 [mm] "MS561101BA03-50"
  rect 1.3x0.5 smd: 1(0.2,4.375) 2(0.2,3.125) 3(0.2,1.875) 4(0.2,0.625) 5(2.8,0.625) 6(2.8,1.875) 7(2.8,3.125) 8(2.8,4.375)
  silkscreen extent -0.4,0 3,5.4, body extent 0,0 3,5, height 1
MergenElektronik_Sensors_Gyroscope-Accelerometer-Magnetometer_24-QFN [mm] "24-QFN"
  rect 0.5x0.2 smd: 1(0,2.5) 2(0,2.1) 3(0,1.7) 4(0,1.3) 5(0,0.9) 6(0,0.5) 13(3,0.5) 14(3,0.9) 15(3,1.3) 16(3,1.7) 17(3,2.1) 18(3,2.5)
  rect 0.2x0.5 smd: 7(0.5,0) 8(0.9,0) 9(1.3,0) 10(1.7,0) 11(2.1,0) 12(2.5,0) 19(2.5,3) 20(2.1,3) 21(1.7,3) 22(1.3,3) 23(0.9,3) 24(0.5,3)
  rect 1.54x1.7 smd paste+0: 25(1.5,1.5)
  rect 1.54x1.7 smd far side: 25(1.5,1.5)
  round 0.5 hole 0.3 paste-2539.97: 25(1.5,1.5)
  silkscreen extent -0.35,0 3,3.35, body extent 0,0 3,3, height 1
MergenElektronik_Sensors_PressureSensors_10-WFLGA [mm] "10-WFLGA"
  rect 0.25x0.6 smd: 1(1.25,1.9) 2(0.75,1.9) 6(0.75,0.1) 7(1.25,0.1)
  rect 0.6x0.25 smd: 3(0.1,1.5) 4(0.1,1) 5(0.1,0.5) 8(1.9,0.5) 9(1.9,1) 10(1.9,1.5)
  silkscreen extent 0,0 2.5,2.5, body extent -0.03,-0.03 2.03,2.03, height 0.81
MergenElektronik_Switches_TactileSwitches_PTS815 [mm] "PTS815"
  rect 1x0.7 smd: 1(0,2.675) 1(4.2,2.675) 2(0,0.525) 2(4.2,0.525)
  silkscreen extent 0,0 4.2,3.2, body extent -0.25,-0.05 4.45,3.25, height 2.5
MergenElektronik_Transistors_Mosfets_8-PowerVDFN [mm] "8-PowerVDFN"
  rect 0.4x0.7 smd: 1(0.575,-0.1) 2(1.225,-0.1) 3(1.875,-0.1) 4(2.525,-0.1)
  round 0.5 hole 0.3: 5(0.7,1.5) 5(0.7,2.3) 5(0.7,3.1) 5(1.5,1.5) 5(1.5,2.3) 5(1.5,3.1) 5(2.3,1.5) 5(2.3,2.3) 5(2.3,3.1)
  rect 2.7x2.5 smd: 5(1.55,2.3)
  rect 2.7x2.5 smd far side: 5(1.55,2.3)
  silkscreen extent 0,0 3.1,3.1, body extent -0.1,-0.1 3.2,3.17, height 0.75

## Part data
C1 C4 C26: library part MergenElektronik_Capacitors_Ceramic_SMDs_10µF_25V, "Mergen Elektronik - Capacitors - Ceramics - SMDs - 0603 - 10 µF - 25V", Manufacturer="Murata Electronics", Manufacturer Number=GRT188R61E106ME13D, Package=0603(1608), Supplier Part Number 1=490-12323-1-ND, Temperature="-55°C up to +85°C", Tolerance=±20%, Voltage Rating=25V, Digi-Key Number=490-12323-1-ND, Farnell Number=3581819, Model="Ceramic Capacitors", Mounting Type="Surface Mount", Mouser Number=81-GRT188R61E106ME3D, Supplier 1=Digi-Key, Supplier 2=Mouser, Supplier Part Number 2=81-GRT188R61E106ME3D
C2 C5: library part MergenElektronik_Capacitors_Ceramic_SMDs_0.33µF_50V, "Mergen Elektronik - Capacitors - Ceramics - SMDs - 0603 - 0.33 µF - 50V", Manufacturer="TDK Corporation", Manufacturer Number=C1608X7R1H334K080AC, Package=0603(1608), Supplier Part Number 1=445-5950-1-ND, Temperature="-55°C up to +125°C", Tolerance=±10%, Voltage Rating=50V, Digi-Key Number=445-5950-1-ND, Farnell Number=2346907, Model="Ceramic Capacitors", Mounting Type="Surface Mount", Mouser Number=810-C1608X7R1H334K, Supplier 1=Digi-Key, Supplier 2=Mouser, Supplier Part Number 2=810-C1608X7R1H334K
C3 C6 C7 C8 C16 C27 C34 C38 C46: library part MergenElektronik_Capacitors_Ceramic_SMDs_1µF_100V, "Mergen Elektronik - Capacitors - Ceramics - SMDs - 1206 - 1 µF - 100V", Manufacturer="Samsung Electro-Mechanics", Manufacturer Number=CL31B105KCHNNNE, Package="1206(3216 Metric)", Supplier Part Number 1=1276-1838-1-ND, Temperature="-55°C up to +125°C", Tolerance=±10%, Voltage Rating=100V, Digi-Key Number=1276-1838-1-ND, Model="Ceramic Capacitors", Mounting Type="Surface Mount", Mouser Number=187-CL31B105KCHNNNE, Supplier 1=Digikey, Supplier 2=Mouser, Supplier Part Number 2=187-CL31B105KCHNNNE, Özdisan Number=CL31B105KCHNNNE
C9 C19: library part MergenElektronik_Capacitors_Ceramic_SMDs_4.7µF_16V, "Mergen Elektronik - Capacitors - Ceramics - SMDs - 0603 - 4.7 µF - 16V", Manufacturer="Samsung Electro-Mechanics", Manufacturer Number=CL10A475KO8NNNC, Package=0603(1608), Supplier Part Number 1=1276-1784-2-ND, Temperature="-55°C up to +85°C", Tolerance=±10%, Voltage Rating=16V, Digi-Key Number=1276-1784-2-ND, Farnell Number=3013397, Model="Ceramic Capacitors", Mounting Type="Surface Mount", Mouser Number=187-CL10A475KO8NNNC, Supplier 1=Digi-Key, Supplier 2=Mouser, Supplier Part Number 2=187-CL10A475KO8NNNC, Özdisan Number=CL10A475KO8NNNC
C10 C11 C12 C13 C14 C15 C17 C18 C20 C29 C30 C31 C32 C33 C35 C36 C37 C39 C40 C41 C42 C43 C44 C45 C47: library part MergenElektronik_Capacitors_Ceramic_SMDs_100nF_100V, "Mergen Elektronik - Capacitors - Ceramics - SMDs - 0603 - 100 nF - 100V", Manufacturer="Samsung Electro-Mechanics", Manufacturer Number=CL10B104KC8NNNC, Package="0603(1608 Metric)", Supplier Part Number 1=1276-6807-1-ND, Temperature="-55°C up to +125°C", Tolerance=±10%, Voltage Rating=100V, Digi-Key Number=1276-6807-1-ND, Farnell Number=3013412, Model="Ceramic Capacitors", Mounting Type="Surface Mount", Mouser Number=187-CL10B104KC8NNNC, Supplier 1=Digikey, Supplier 2=Mouser, Supplier Part Number 2=187-CL10B104KC8NNNC, Özdisan Number=CL10B104KC8NNNC
C23 C24: library part MergenElektronik_Capacitors_Ceramic_SMDs_18pF_50V, "Mergen Elektronik - Capacitors - Ceramics - SMDs - 0603 - 18 pF - 50V", Manufacturer=YAGEO, Manufacturer Number=CC0603JRNPO9BN180, Package=0603(1608), Supplier Part Number 1=603-CC603JRNPO9BN180, Temperature="-55°C up to +125°C", Tolerance=±5%, Voltage Rating=50V, Digi-Key Number=311-1061-1-ND, Farnell Number=2408496, Model="Ceramic Capacitors", Mounting Type="Surface Mount", Mouser Number=603-CC603JRNPO9BN180, Supplier 1=Mouser, Supplier 2=Digi-Key, Supplier Part Number 2=311-1061-6-ND
C25: library part MergenElektronik_Capacitors_Ceramic_SMDs_47µF_25V, "Mergen Elektronik - Capacitors - Ceramics - SMDs - 1206 - 47 µF - 25V", Manufacturer="TDK Corporation", Manufacturer Number=C3216X5R1E476M160AC, Package=1206(3216), Supplier Part Number 1=445-8047-2-ND, Temperature="-55°C up to +85°C", Tolerance=±20%, Voltage Rating=25V, Digi-Key Number=445-8047-2-ND, Farnell Number=2525172, Model="Ceramic Capacitors", Mounting Type="Surface Mount", Mouser Number=810-C3216X5R1E476M, Supplier 1=Digi-Key, Supplier 2=Mouser, Supplier Part Number 2=810-C3216X5R1E476M, Özdisan Number=C3216X5R1E476M160AC
C28: library part MergenElektronik_Capacitors_Ceramic_SMDs_100µF_10V, "Mergen Elektronik - Capacitors - Ceramics - SMDs - 1210 - 100 µF - 10V", Manufacturer="Samsung Electro-Mechanics", Manufacturer Number=CL32A107MPVNNNE, Package="1210(3225 Metric)", Supplier Part Number 1=187-CL10B104KO8NNNC, Temperature="-55°C up to +85°C", Tolerance=±20%, Voltage Rating=10V, Digi-Key Number=1276-3364-1-ND, Farnell Number=1838744, Model="Ceramic Capacitors", Mounting Type="Surface Mount", Mouser Number=187-CL32A107MPVNNNE, Supplier 1=Mouser, Supplier 2=Digi-Key, Supplier Part Number 2=1276-1005-6-ND, Özdisan Number=CL10B104KO8NNNC
D1 D3: library part MergenElektronik_Diodes_SchottkyDiodes_B0520LW-7-F, "Mergen Elektronik - Diodes - Schottky Diodes - B0520LW-7-F", Breakdown Voltage=20V, Current Rating=500mA, Forward Voltage="385 mV @ 500mA", Manufacturer="Diodes Incorporated", Package=SOD-123, Supplier Part Number 1=B0520LW-FDITR-ND, Temperature="-65°C up to +125°C", Digi-Key Number=B0520LW-FDITR-ND, Farnell Number=1773476, Manufacturer Number=B0520LW-7-F, Model="Schottky Diodes", Mounting Type="Surface Mount", Mouser Number=621-B0520LW-F, Supplier 1=Digikey, Supplier 2=Mouser, Supplier Part Number 2=621-B0520LW-F
D2 D4 D5: library part MergenElektronik_LEDs_SMDs_Red_0603, "Mergen Elektronik - Leds - SMDs - Red - 0603", Manufacturer="Würth Elektronik", Manufacturer Number=150060RS75000, Package=0603(1608), Supplier Part Number 1=732-4978-1-ND, Temperature="-45°C up to +85°C", Voltage Rating=2V, Color=Red, Digi-Key Number=732-4978-1-ND, Farnell Number=2322071, Model="SMD Leds", Mounting Type="Surface Mount", Mouser Number=710-150060RS75000, Supplier 1=Digi-Key, Supplier 2=Mouser, Supplier Part Number 2=710-150060RS75000, Özdisan Number=150060RS75000
D6 D7: library part MergenElektronik_Diodes_TVSDiodes_DESD3V3S1BL-7B, "Mergen Elektronik - Diodes - TVS Diodes - DESD3V3S1BL-7B", Breakdown Voltage=3.8V, Capacitance @ Frequency="10pF @ 1MHz", Current - Peak Pulse=5A(8/20µs), Manufacturer="Diodes Incorporated", Package="0402 (1006 Metric)", Supplier Part Number 1=621-DESD3V3S1BL-7B, Temperature="-65°C up to +150°C", Voltae Clamping=7V, Voltage Reverse Standoff=3.3V(Max), Digi-Key Number=DESD3V3S1BL-7BDITR-ND, Farnell Number=3127287, Manufacturer Number=DESD3V3S1BL-7B, Model="TVS Diodes", Mounting Type="Surface Mount", Mouser Number=621-DESD3V3S1BL-7B, Supplier 1=Digikey, Supplier 2=Mouser, Supplier Part Number 2=DESD3V3S1BL-7BDITR-ND
D8: library part MergenElektronik_LEDs_SMDs_Green_0603, "Mergen Elektronik - Leds - SMDs - Green - 0603", Manufacturer="Würth Elektronik", Manufacturer Number=150060GS75000, Package=0603(1608), Supplier Part Number 1=732-4971-6-ND, Temperature="-45°C up to +85°C", Voltage Rating=3.2V, Color=Green, Digi-Key Number=732-4971-1-ND, Farnell Number=2322070, Model="SMD Leds", Mounting Type="Surface Mount", Mouser Number=710-150060GS75000, Supplier 1=Digi-Key, Supplier 2=Mouser, Supplier Part Number 2=710-150060GS75000, Özdisan Number=150060GS75000
D9: library part MergenElektronik_LEDs_SMDs_White_0603, "Mergen Elektronik - Leds - SMDs - White - 0603", Manufacturer="Harvatek Corporation", Manufacturer Number=B1931TW--20P000314U1930, Package=0603(1608), Supplier Part Number 1=3147-B1931TW--20P000314U1930TR-ND, Temperature="-40°C up to +85°C", Voltage Rating=3.2V, Color=White, Digi-Key Number=3147-B1931TW--20P000314U1930CT-ND, Model="SMD Leds", Mounting Type="Surface Mount", Supplier 1=Digi-Key
F1: library part "MergenElektronik_CircuitProtections_Fuses_0C1Q 5", "Mergen Elektronik - Circuit Protections - Fuses - 0C1Q 5", Breaking Capacity="100A @ AC,- 50A @ DC", Current Rating="5 A", Manufacturer="Bel Fuse Inc.", Package=1206(3216), Supplier Part Number 1=507-1811-6-ND, Temperature="-40°C up to 85°C", Voltage Rating="125V @ AC - 63V @ DC", Digi-Key Number=5923-C1Q5TR-ND, Manufacturer Number="C1Q 5", Melting I²t=0.075, Model=Fuse, Mounting Type="Surface Mount", Mouser Number=530-0ZCK0020FF2G, Response Time="Fast Blow", Supplier 1=Digi-Key
FB1: library part MergenElektronik_Filters_FerriteBeads_BLM18BD601SN1D, "Mergen Elektronik - Filters - Ferrite Beads - BLM18BD601SN1D", Current Rating=200mA, DC Resistance=650mOhm, Manufacturer="Murata Electronics", Package="0603(1608 Metric)", Supplier Part Number 1=490-1023-2-ND, Temperature="-55°C up to 125°C", Impedance @ Frequency="600 Ohms @ 100 MHz", Digi-Key Number=490-1023-2-ND, Farnell Number=1515713, Manufacturer Number=BLM18BD601SN1D, Mounting Type="Surface Mount", Mouser Number=81-BLM11B601S, Supplier 1=Digi-Key, Supplier 2=Mouser, Supplier Part Number 2=81-BLM11B601S
IC1: library part MergenElektronik_Regulators_Linears_MC7805BDTG, "Mergen Elektronik - Regulators - Linears - MC7805BDTG", Current Rating=1A, Manufacturer=onsemi, Manufacturer Number=MC7805BDTG, Output Voltage=5V, Package=DPAK, Supplier Part Number 1=MC7805BDTGOS-ND, Temperature="-40°C up to +125°C", Voltage Rating="7VDC up to 36V", Digi-Key Number=MC7805BDTGOS-ND, Farnell Number=1652336, Model=Linear, Mounting Type="Surface Mount", Mouser Number=863-MC7805BDTG, Supplier 1=Digi-Key, Supplier 2=Mouser, Supplier Part Number 2=863-MC7805BDTG, Özdisan Number=MC7805BDTG
IC2: library part MergenElektronik_Regulators_Linears_NCP1117ST33T3G, "Mergen Elektronik - Regulators - Linears - NCP1117ST33T3G", Current Rating=1A, Manufacturer=onsemi, Manufacturer Number=NCP1117ST33T3G, Output Voltage=3.3V, Package=SOT-223, Supplier Part Number 1=NCP1117ST33T3GOSCT-ND, Temperature="0°C up to +125°C", Voltage Rating="4.75VDC up to 10V", Digi-Key Number=NCP1117ST33T3GOSCT-ND, Model=Linear, Mounting Type="Surface Mount", Mouser Number=863-NCP1117ST33T3G, Supplier 1=Digi-Key, Supplier 2=Mouser, Supplier Part Number 2=863-NCP1117ST33T3G, Özdisan Number=NCP1117ST33T3G
IC3: library part MergenElektronik_Regulators_Linears_MIC5504-1.8YM5-TR, "Mergen Elektronik - Regulators - Linears - MIC5504-1.8YM5-TR", Current Rating=300mA, Manufacturer="Microchip Technology", Output Voltage=1.8V(Fixed), Package=SOT-23-5, Supplier Part Number 1=576-4879-2-ND, Temperature="-40°C up to +125°C", Voltage Rating="2.2V up to 5.5V", Digi-Key Number=576-4879-2-ND, Farnell Number=2809977, Manufacturer Number=MIC5504-1.8YM5-TR, Model=Linear, Mounting Type="Surface Mount", Mouser Number=998-MIC5504-1.8YM5TR, Supplier 1=Digikey, Supplier 2=Mouser, Supplier Part Number 2=998-MIC5504-1.8YM5TR
J1: library part MergenElektronik_Connectors_Headers_2x3_Male, "Mergen Elektronik - Connectors - Headers - 2x3 Male"
J2: library part MergenElektronik_Connectors_Headers_1x4_Male, "Mergen Elektronik - Connectors - Headers - 1x4 Male"
J3: library part MergenElektronik_Connectors_USB_USB4105, "Mergen Elektronik - Connectors - USB Connectors - USB4105", Current Rating="0.25A, 1.25A, 5A, 6.25A", Manufacturer=GCT, Manufacturer Number=USB4105-GF-A, Supplier Part Number 1=2073-USB4105-GF-ADKR-ND, Temperature="-40°C up to 85°C", Voltage Rating=20VDC, Digi-Key Number=2073-USB4105-GF-ACT-ND, Farnell Number=3588205, Model="Type - C / USB 2.0", Mounting Type="THT - SMD R/A", Mouser Number=640-USB4105-GF-A, Package=USB4105, Supplier 1=Digi-Key, Supplier 2=Mouser, Supplier Part Number 2=640-USB4105-GF-A, Özdisan Number=USB4105-GF-A
J4: library part MergenElekttronik_Connectors_D-Sub_Female_9Position, "Mergen Elektronik - Connectors - D-Sub - Female 9 Position", Current Rating=3A, Manufacturer="Assmann WSW Components", Manufacturer Number="A-DF 09 A/KG-T2S", Supplier Part Number 1=AE10921-ND, Temperature="-55°C up to 105°C", Voltage Rating=250V, Connector Style=D-Sub, Connector Type=Female, Digi-Key Number=AE10921-ND, Model="D-Sub 9 Position Female Connector", Mounting Type=THT, Number of Postion=9, Number of Rows=2, Supplier 1=Digi-kEY
J5: library part MergenElektronik_Connectors_MicroSD_MEM2075, "Mergen Elektronik - Connectors - SD Card Connectors - MEM2075", Current Rating="500 mA per pin.", Manufacturer=GCT, Manufacturer Number=MEM2075-00-140-01-A, Supplier Part Number 1=2073-MEM2075-00-140-01-ADKR-ND, Temperature="-25°C up to +85°C", Voltage Rating=30VDC/AC, Digi-Key Number=2073-MEM2075-00-140-01-ACT-ND, Farnell Number=2895610, Model="Micro SD", Mounting Type="Surface Mount", Mouser Number=640-MEM20750014001A, Package=MEM2075, Supplier 1=Digi-Key, Supplier 2=Mouser, Supplier Part Number 2=640-MEM20750014001A
L1: library part MergenElektronik_Inductors_PowerInductors_SMDs_1008_2.2µH-2A, "Mergen Elektronik - Inductors - Power Inductors - SMDs - 1008 - 2.2 µh - 2A", Current Rating=2A, Manufacturer="Samsung Electro-Mechanics", Manufacturer Number=CIGT252008LM2R2MNE, Package="1008 (2520 Metric)", Supplier Part Number 1=1276-6925-6-ND, Temperature="-40°C up to  125°C", Digi-Key Number=1276-6925-1-ND, Model="Power Inductor", Mounting Type="Surface Mount", Mouser Number=187-CIGT252008LM2R2M, Supplier 1=Digi-Key, Supplier 2=Mouser, Supplier Part Number 2=187-CIGT252008LM2R2M
PTC1: library part MergenElektronik_CircuitProtections_PTCs_0ZCK0020FF2G, "Mergen Elektronik - Circuit Protections - PTCs - 0ZCK0020FF2G", Current - Hold="200 mA", Current - Max=100A, Current - Trip="500 mA", Manufacturer="Bel Fuse Inc.", Package=0805(2012), Supplier Part Number 1=507-1811-6-ND, Temperature="-40°C up to 85°C", Voltage Rating=9V, Current Rating="500 mA", Digi-Key Number=507-1811-1-ND, Manufacturer Number=0ZCK0020FF2G, Model="PTC Fuse", Mounting Type="Surface Mount", Mouser Number=530-0ZCK0020FF2G, Supplier 1=Digi-Key, Supplier 2=Mouser, Supplier Part Number 2=530-0ZCK0020FF2G
Q1 Q2: library part MergenElektronik_Transistors_Mosfets_DMN1004UFV-7, "Mergen Elektronik - Transistors - Mosfets - DMN1004UFV-7", Current Rating=70A, Manufacturer=onsemi, Package=8-PowerVDFN, Temperature="-55°C up to +150°C (TJ)", Voltage Rating=12V, Digi-Key Number=DMN1004UFV-7DITR-ND, Farnell Number=3518380, Manufacturer Number=DMN1004UFV-7, Model=Mosfet, Mounting Type="Surface Mount", Mouser Number=621-DMN1004UFV-7, Rating Current=70A, Supplier 1=Digi-Key, Supplier 2=Mouser, Supplier Part Number 1=DMN1004UFV-7, Supplier Part Number 2=621-DMN1004UFV-7, Vdss=12V, Id=70A
R1 R2 R3 R4 R37: library part MergenElektronik_Resistors_ChipResistors_0603_330R, "Mergen Elektronik - Resistors - Chip Resistors - 0603 - 330R", Manufacturer="Stackpole Electronics Inc", Manufacturer Number=RMCF0603JT330R, Package=0603(1608), Power=1/10W, Supplier Part Number 1=RMCF0603JT330RCT-ND, Temperature="-55°C up to +155°C - X8R", Tolerance=±5%, Digi-Key Number=RMCF0603JT330RCT-ND, Model="Chip Resistor", Mounting Type="Surface Mount", Supplier 1=Digi-Key
R5: library part MergenElektronik_Resistors_ChipResistors_0603_40K, "Mergen Elektronik - Resistors - Chip Resistors - 0603 - 40K", Manufacturer=YAGEO, Manufacturer Number=RT0603BRD0740KL, Package=0603(1608), Power=1/10W, Supplier Part Number 1=13-RT0603BRD0740KLDKR-ND, Temperature="-55°C up to +155°C - X8R", Tolerance=±0.1%, Digi-Key Number=13-RT0603BRD0740KLTR-ND, Model="Chip Resistor", Mounting Type="Surface Mount", Mouser Number=603-RT0603BRD0740KL, Supplier 1=Digikey, Supplier 2=Mouser, Supplier Part Number 2=603-RT0603BRD0740KL
R6 R7 R16 R18 R19 R20 R21 R22 R23 R26 R28 R29 R30 R33 R34 R35 R36: library part MergenElektronik_Resistors_ChipResistors_0603_10K, "Mergen Elektronik - Resistors - Chip Resistors - 0603 - 10K", Manufacturer="Stackpole Electronics Inc", Manufacturer Number=RMCF0603JT10K0, Package=0603(1608), Power=1/10W, Supplier Part Number 1=RMCF0603JT10K0-ND, Temperature="-55°C up to +155°C - X8R", Tolerance=±5%, Digi-Key Number=RMCF0603JT10K0CT-ND, Model="Chip Resistor", Mounting Type="Surface Mount", Supplier 1=Digi-Key
R8 R9: library part MergenElektronik_Resistors_ChipResistors_0603_1.8K, "Mergen Elektronik - Resistors - Chip Resistors - 0603 - 1.8K", Manufacturer="Stackpole Electronics Inc", Manufacturer Number=RMCF0603JT1K80, Package=0603(1608), Power=1/10W, Supplier Part Number 1=RMCF0603JT1K80TR-ND, Temperature="-55°C up to +155°C - X8R", Tolerance=±5%, Digi-Key Number=RMCF0603JT1K80TR-ND, Model="Chip Resistor", Mounting Type="Surface Mount", Mouser Number=708-RMCF0603JT1K80, Supplier 1=Digikey, Supplier 2=Mouser, Supplier Part Number 2=708-RMCF0603JT1K80
R10 R11: library part MergenElektronik_Resistors_ChipResistors_0603_22, "Mergen Elektronik - Resistors - Chip Resistors - 0603 - 22", Manufacturer="TE Connectivity Passive Product", Manufacturer Number=CRGCQ0603J22R, Package=0603(1608), Power=1/10W, Supplier Part Number 1=A130081CT-ND, Temperature="-55°C up to +155°C - X8R", Tolerance=±5%, Digi-Key Number=A130081CT-ND, Farnell Number=2861854, Model="Chip Resistor", Mounting Type="Surface Mount", Mouser Number=279-CRGCQ0603J22R, Supplier 1=Digi-Key, Supplier 2=Mouser, Supplier Part Number 2=279-CRGCQ0603J22R, Özdisan Number=RMCF0603ZT0R00
R12 R13: library part MergenElektronik_Resistors_ChipResistors_0603_5.1K, "Mergen Elektronik - Resistors - Chip Resistors - 0603 - 5.1K", Manufacturer="Stackpole Electronics Inc", Manufacturer Number=RMCF0603JT5K10, Package=0603(1608), Power=1/10W, Supplier Part Number 1=RMCF0603JT5K10DKR-ND, Temperature="-55°C up to +155°C - X8R", Tolerance=±5%, Digi-Key Number=RMCF0603JT5K10CT-ND, Model="Chip Resistor", Mounting Type="Surface Mount", Mouser Number=708-RMCF0603JT5K10, Supplier 1=Digi-Key
R14 R15: library part MergenElektronik_Resistors_ChipResistors_0603_4.7K, "Mergen Elektronik - Resistors - Chip Resistors - 0603 - 4.7K", Manufacturer="Stackpole Electronics Inc", Manufacturer Number=RMCF0603FT4K70, Package=0603(1608), Power=1/10W, Supplier Part Number 1=RMCF0603FT4K70TR-ND, Temperature="-55°C up to +155°C - X8R", Tolerance=±1%, Digi-Key Number=RMCF0603FT4K70TR-ND, Model="Chip Resistor", Mounting Type="Surface Mount", Mouser Number=708-RMCF0603FT4K70, Supplier 1=Digikey, Supplier 2=Mouser, Supplier Part Number 2=708-RMCF0603FT4K70
R17: library part MergenElektronik_Resistors_ChipResistors_0603_200K, "Mergen Elektronik - Resistors - Chip Resistors - 0603 - 200K", Manufacturer="Stackpole Electronics Inc", Manufacturer Number=RMCF0603FT200K, Package=0603(1608), Power=1/10W, Supplier Part Number 1=RMCF0603FT200KTR-ND, Temperature="-55°C up to +155°C - X8R", Tolerance=±1%, Digi-Key Number=RMCF0603FT200KTR-ND, Model="Chip Resistor", Mounting Type="Surface Mount", Mouser Number=708-RMCF0603FT200K, Supplier 1=Digikey, Supplier 2=Mouser, Supplier Part Number 2=708-RMCF0603FT200K
R24 R25 R27: library part MergenElektronik_Resistors_ChipResistors_0603_470, "Mergen Elektronik - Resistors - Chip Resistors - 0603 - 470", Manufacturer="Stackpole Electronics Inc", Manufacturer Number=RMCF0603JT470R, Package=0603(1608), Power=1/10W, Supplier Part Number 1=RMCF0603JT470RTR-ND, Temperature="-55°C up to +155°C - X8R", Tolerance=±5%, Digi-Key Number=RMCF0603JT470RTR-ND, Model="Chip Resistor", Mounting Type="Surface Mount", Mouser Number=708-RMCF0603JT470R, Supplier 1=Digikey, Supplier 2=Mouser, Supplier Part Number 2=708-RMCF0603JT470R
R31 R32: library part MergenElektronik_Resistors_ChipResistors_0603_1K, "Mergen Elektronik - Resistors - Chip Resistors - 0603 - 1K", Manufacturer="Stackpole Electronics Inc", Manufacturer Number=RMCF0603JT1K00, Package=0603(1608), Power=1/10W, Supplier Part Number 1=RMCF0603JT1K00DKR-ND, Temperature="-55°C up to +155°C - X8R", Tolerance=±5%, Digi-Key Number=RMCF0603JT1K00CT-ND, Model="Chip Resistor", Mounting Type="Surface Mount", Mouser Number=708-RMCF0603JT1K00, Supplier 1=Digikey, Supplier 2=Mouser, Supplier Part Number 2=708-RMCF0603JT1K00